# EAGLE board XIAO-XBee (EAGLE 9.6.2)

Size 31.42 x 35.55 mm. Coordinates in mm from the lower left corner, seen from the top.
Outline: 0,0 31.42,0 31.42,35.55 0,35.55 0,0
Copper layers (1*16): Top 0.035mm / dielectric 1.5mm / Bottom 0.035mm
Design rules "default": minimum track width 6mil, minimum drill 0.35mm, track to track 6mil, track to pad 6mil, pad to pad 6mil, via to via 6mil, smd to smd 6mil, copper to edge 40mil, drill to drill 6mil, minimum pad ring 10mil, minimum via ring 8mil, stop-mask expansion 4mil, vias tented up to drill 0mil, thermal gap 10mil
Net classes: 0 default: width 0.305 mm, drill 0.508 mm, clearance 0.508 mm

## Footprints (pad centres in the part's own frame; a part is rotated, then mirrored left to right if it is on the bottom)
XBEE = drill 0.7 pad 1.422 square: 1 -11,5.5 | drill 0.7 pad 1.422: 2 -11,3.5; 3 -11,1.5; 4 -11,-0.5; 5 -11,-2.5; 6 -11,-4.5; 7 -11,-6.5; 8 -11,-8.5; 9 -11,-10.5; 10 -11,-12.5; 11 11,-12.5; 12 11,-10.5; 13 11,-8.5; 14 11,-6.5; 15 11,-4.5; 16 11,-2.5; 17 11,-0.5; 18 11,1.5; 19 11,3.5; 20 11,5.5
1X07 = drill 1.016 pad 1.88: 1 0,0; 2 2.54,0; 3 5.08,0; 4 7.62,0; 5 10.16,0; 6 12.7,0; 7 15.24,0

## Placement (x,y rotation side)
XBEES2C  XBEE  [XBEE]  15.24,20.32 0 bottom
XIAO-1-7  [1X07]  7.69,29.79 270 top
XIAO-8-14  [1X07]  22.8,14.55 90 top

## Library data of the parts
XBEES2C = adafruit
XIAO-1-7 XIAO-8-14 = SparkFun-Connectors

## Nets
GND: XBEES2C.10 XIAO-8-14.6
N$3: XBEES2C.3 XIAO-1-7.7
N$5: XBEES2C.8 XIAO-1-7.3
N$9: XBEES2C.2 XIAO-8-14.1
VCC: XBEES2C.1 XIAO-8-14.5

## Tracks (layer width: path | path; a pad name or v marks a point on that pad's centre or on a via)
GND  (1 unrouted)
N$3  (1 unrouted)
N$5  (1 unrouted)
N$9  (1 unrouted)
VCC  (1 unrouted)
(copper drawn outside any net)
  shapes: Top area x2